# EAGLE board PCB_Gabri (EAGLE 7.6.0)
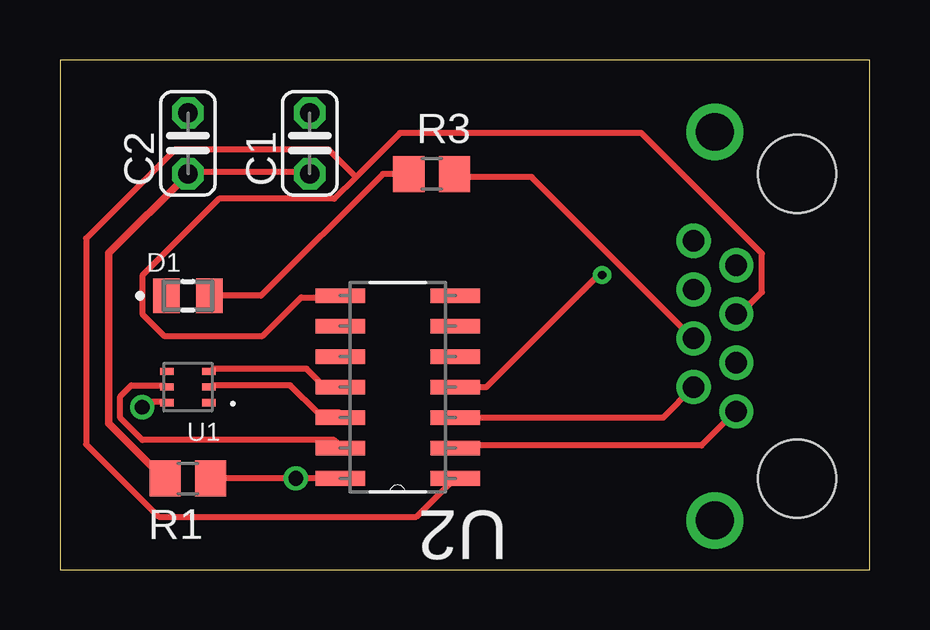
[diagram p0: board, top side]
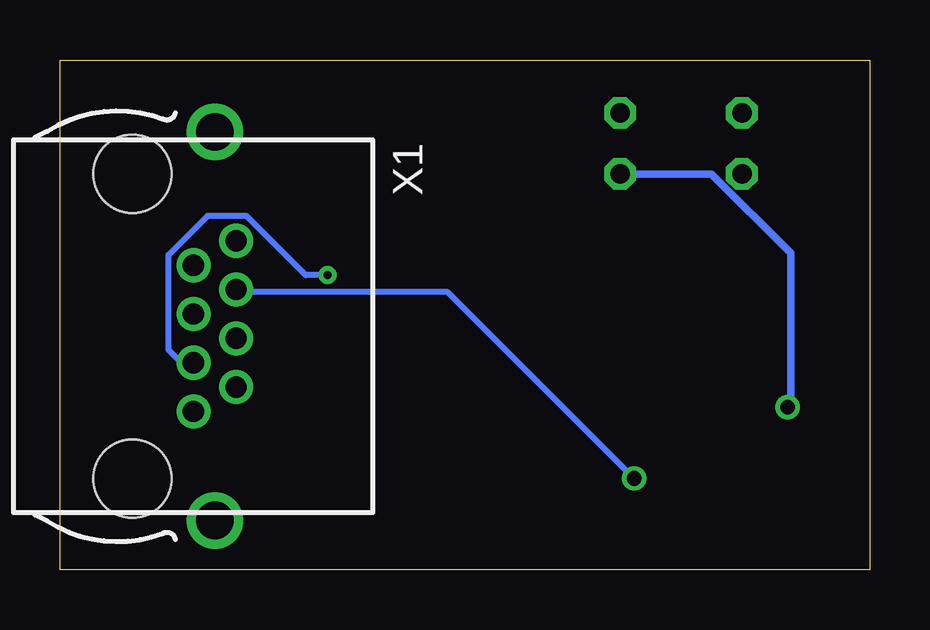
[diagram p1: board, bottom side, seen from below]

Size 33.76 x 21.26 mm. Coordinates in mm from the lower left corner, seen from the top.
Outline: 0,0 33.76,0 33.76,21.26 0,21.26 0,0
Copper layers (1*16): Top 0.035mm / dielectric 1.5mm / Bottom 0.035mm
Design rules "default": minimum track width 10mil, minimum drill 24mil, track to track 8mil, track to pad 8mil, pad to pad 8mil, via to via 8mil, smd to smd 8mil, copper to edge 40mil, drill to drill 8mil, minimum pad ring 10mil, minimum via ring 8mil, stop-mask expansion 4mil, vias tented up to drill 0mil, thermal gap 10mil
tRestrict: area 12.2,3.6 to 15.7,11.7; 8 lines

## Footprints (pad centres in the part's own frame; a part is rotated, then mirrored left to right if it is on the bottom)
C025-024X044 = drill 0.813 octagon: 1 -1.27,0; 2 1.27,0
LEDC2012X70N = smd 1.1 x 1.45: A 0.9,0; C -0.9,0
R0805 = smd 1.3 x 1.5: 1 -0.95,0; 2 0.95,0
VISHAY_VEML6030_2X2X0.87 = smd 0.55 x 0.3: 1 -0.875,0.65; 2 -0.875,0; 3 -0.875,-0.65; 4 0.875,-0.65; 5 0.875,0; 6 0.875,0.65
SOIC127P600X175-14N = smd 2.057 x 0.61: 1 -4.801,7.62; 2 -4.801,6.35; 3 -4.801,5.08; 4 -4.801,3.81; 5 -4.801,2.54; 6 -4.801,1.27; 7 -4.801,0; 8 0,0; 9 0,1.27; 10 0,2.54; 11 0,3.81; 12 0,5.08; 13 0,6.35; 14 0,7.62
0446200002 = drill 0.889 pad 1.422: 1 3.556,2.54; 2 2.54,4.318; 3 1.524,2.54; 4 0.508,4.318; 5 -0.508,2.54; 6 -1.524,4.318; 7 -2.54,2.54; 8 -3.556,4.318 | drill 1.575 pad 2.286: S@1 -8.103,3.429; S@2 8.103,3.429 | hole 3.251: 6.35,0; -6.35,0

## Placement (x,y rotation side)
C1  [C025-024X044]  10.41,17.78 90 top
C2  [C025-024X044]  5.33,17.78 90 top
D1  5988170107F  [LEDC2012X70N]  5.33,11.43 0 top
R1  [R0805]  5.33,3.81 180 top
R3  [R0805]  15.49,16.51 0 top
U1  VEML6030  [VISHAY_VEML6030_2X2X0.87]  5.33,7.62 180 top
U2  TXS0104ED  [SOIC127P600X175-14N]  11.68,11.43 180 top
X1  0446200002  [0446200002]  30.73,10.16 270 bottom

## Library data of the parts
C1 C2 R1 R3 = resistor
D1 = 5988170107F; AVAILABILITY: Unavailable; DESCRIPTION: LED GREEN CLEAR 0805 SMD; MF: Dialight; MP: 5988170107F; PACKAGE: 0805 Dialight; PRICE: None
U1 = VEML6030; AVAILABILITY: Unavailable; DESCRIPTION: VEML6030 Series 2 x 2 x 0.85 mm 50 mW I2C High Accuracy Ambient Light Sensor; MF: Vishay; MP: VEML6030; PACKAGE: SMD-6 Vishay; PRICE: None
U2 = TXS0104ED; AVAILABILITY: Unavailable; DESCRIPTION: 4-Bit Bidirectional Voltage-Level Shifter for Open-Drain and Push-Pull Applications 14-SOIC -40 to 85; MF: Texas Instruments; MP: TXS0104ED; PACKAGE: SOIC-14 Texas Instruments; PRICE: None
X1 = 0446200002; AVAILABILITY: Unavailable; DESCRIPTION: Conn RJ-45 RCP 8 POS 2.04mm Solder RA Thru-Hole 8 Terminal 1 Port Tray Cat 3; MF: Molex, LLC; MP: 0446200002; PACKAGE: None; PRICE: None

## Nets
GND: U1.1
LED_1: R3.2 X1.4
LED_2: D1.A R3.1
N$1: R1.2
N$3: U1.5 U2.13
N$4: U1.3 U2.11
N$5: U1.2 U2.12
N$7: U2.2 X1.1
N$8: U2.3 X1.2
N$9: U2.4 X1.3
N$10: R1.1 U2.14 X1.6
N$17: U2.1 U2.8 X1.5
S$1: U1.6
S$2: C1.1 C2.1

## Tracks (layer width: path | path; a pad name or v marks a point on that pad's centre or on a via)
LED_1
  Top 0.254: R3.2 16.46,16.38 19.66,16.38 26.29,9.75 X1.4
LED_2
  Top 0.254: R3.1 13.46,16.51 8.38,11.43 D1.A
N$1
  Top 0.254: 4.34,3.81 R1.2
N$3
  Top 0.254: U1.5 4.34,7.7 2.97,7.7 2.52,7.24 2.52,6.32 3.43,5.41 11.43,5.41 11.66,5.18 U2.13
N$4
  Top 0.254: U1.3 6.4,8.38 10.29,8.38 10.97,7.7 11.66,7.7 U2.11
N$5
  Top 0.254: U1.2 6.4,7.7 9.6,7.7 10.74,6.55 11.66,6.55 U2.12
N$7
  Top 0.254: U2.2 16.69,5.18 26.75,5.18 28.12,6.55 X1.1
N$8
  Top 0.254: U2.3 25.15,6.35 X1.2
N$9  (via drill 0.35)
  Top 0.254: U2.4 17.78,7.62 22.45,12.29 v22.61,12.29
  Bottom 0.254: X1.3 28.7,8.64 29.24,9.17 29.24,13.13 27.61,14.76 25.99,14.76 23.52,12.29 v22.61,12.29
N$10  (via drill 0.61)
  Top 0.254: U2.14 v9.83,3.81 R1.1
  Bottom 0.254: v9.83,3.81 17.6,11.58 26.29,11.58 X1.6
N$17
  Top 0.254: 12.34,16.38 14.17,18.21 24.23,18.21 29.26,13.18 29.26,11.58 28.35,10.67 X1.5 | 12.34,16.38 11.43,15.47 6.63,15.47 3.43,12.27 3.43,10.67 4.34,9.75 8.46,9.75 10.06,11.35 11.66,11.35 U2.8 | 12.34,16.38 11.2,17.53 4.8,17.53 1.09,13.82 1.09,5.23 4.12,2.21 14.86,2.21 16.46,3.81 U2.1
S$1  (via drill 0.61)
  Top 0.254: U1.6 4.34,7.01 3.66,7.01 v3.43,6.78
S$2
  Top 0.254: C1.1 10.29,16.61 5.49,16.61 C2.1 5.51,16.64
  Top 0.305: 4.32,3.81 2.03,6.1 2.03,13.21 C2.1
  Bottom 0.305: 3.3,6.86 3.3,13.21 6.6,16.51 C1.1